# Altium PCB demo_dermis_main_testboard_scratch.PcbDoc (part 2 of 7)
Units mm, origin at the board's own origin, x right, y up, seen from the top; angles counter-clockwise.
Board outline 348.67 x 247.5 mm, 4 copper layers (Top Layer, Layer 1, Layer 2, Bottom Layer), stack 0.603 mm thick; 416 components, 288 nets, 1934 pads, 1690 vias.
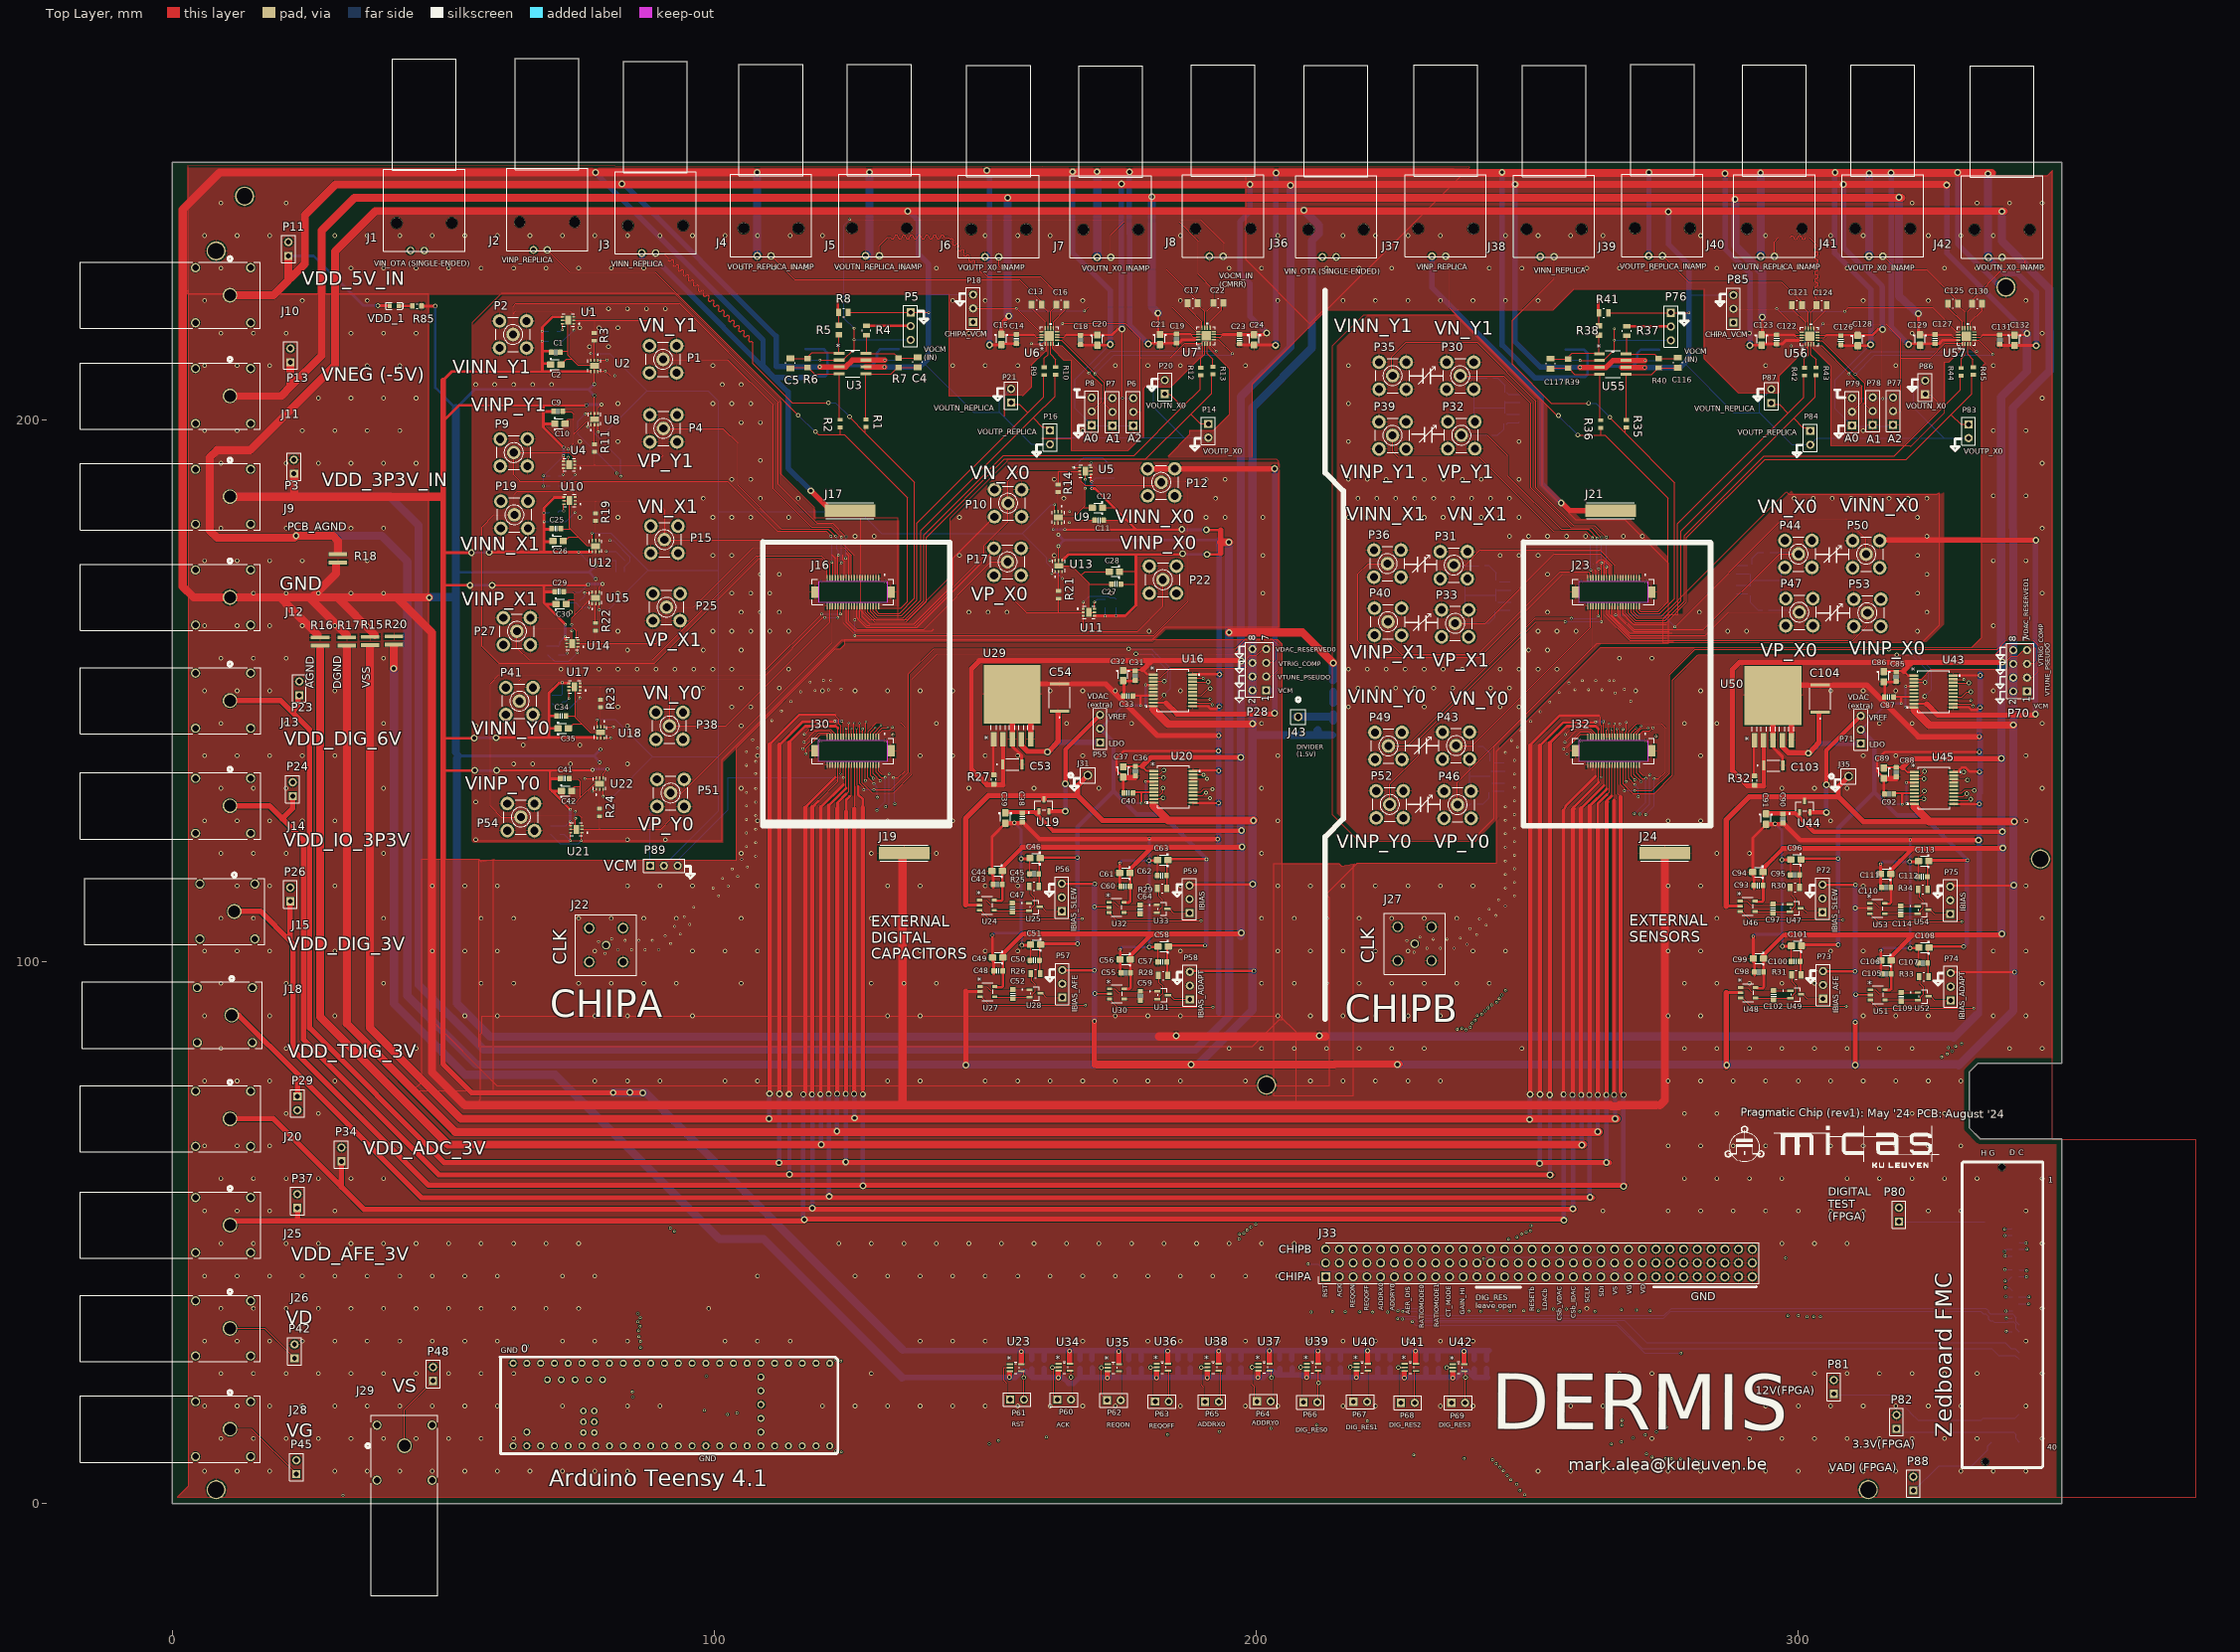
[diagram p0: Top Layer view]

## Part data (continued)
U26: "RT1062 Teensy 4.1 series ARM® Cortex®-M7 MPU Embedded Evaluation Board", Package=None, Check_prices=https://www.snapeda.com/parts/DEV-16771/SparkFun+Electronics/view-part/?ref=eda, MF="SparkFun Electronics", MP=DEV-16771, SnapEDA_Link=https://www.snapeda.com/parts/DEV-16771/SparkFun+Electronics/view-part/?ref=snap
VDD_1: library part LED_SMD_Red_0603_220mcd, "LED 0603 SMD Hyper Red 630nm 220mcd 20mA", Manufacturer 1="Kingbright Corp", Manufacturer Part Number 1=APT1608SURCK, Package / Case="0603 (1608 metric)", Ratings="220 mcd; 630 nm", Supplier Part Number 1=754-1123-1-ND, Voltage - Forward (Vf) @ 10mA=1.9V, Voltage - Forward (Vf) Typ=1.95V, Material="AlGaInP on GaAs", Supplier 1=Digi-Key

## Free pads (board coordinates)
  round 3.508 hole 3 mask+0: 3(8.122,2.566) 3(8.122,231.166) 3(13.354,241.272) 3(201.909,77.232) 3(312.922,2.566) 3(338.322,224.469) 3(344.692,118.957)

## Via types
v1: diameter 0.85, hole 0.5, Top Layer to Bottom Layer, 1036 vias
v2: diameter 0.5, hole 0.3, Top Layer to Bottom Layer, 455 vias
v3: diameter 1.27, hole 0.711, Top Layer to Bottom Layer, 133 vias
v4: diameter 0.7, hole 0.4, Top Layer to Bottom Layer, 26 vias
v5: diameter 0.4, hole 0.25, Top Layer to Bottom Layer, 24 vias
v6: diameter 1.1, hole 0.7, Top Layer to Bottom Layer, 16 vias

## Nets (pads, with @x,y where several pads share a name; then routed paths per layer and width w, separated by ;. In a path a pad name is that pad's centre, name@x,y a point inside that pad or via, vN(x,y) a via of type N, cw(c..) or ccw(c..) an arc to the next point about the centre after c; other vN are vias at no path point)
A0: P8.2 U6.4 U7.4 | length 44.9
  Top Layer w0.2: U6.4@162.584,214.027 162.584,213.747 162.611,213.72 164.088,213.72 169.129,208.68 171.505,206.304 171.505,203.405 P8.2@169.657,201.557 ; U7.4@191.479,214.086 191.479,213.806 v2(192.624,212.662)
  Bottom Layer w0.2: v2(169.112,208.663) 169.221,208.663 173.219,212.662 v2(192.624,212.662)
A1: P7.2 U6.5 U7.5 | length 49.7
  Top Layer w0.2: U6.5@163.281,214.724 164.129,214.724 172.016,206.837 172.016,202.913 P7.2@173.467,201.462 P7.2@173.467,201.124 ; U7.5@192.177,214.783 193.024,214.783 v2(195.604,212.203)
  Bottom Layer w0.2: v2(170.261,208.487) 173.757,211.983 195.385,211.983 v2(195.604,212.203)
A2: P6.2 U6.1 U7.1 | length 52.7
  Top Layer w0.2: v2(158.531,214.074) 160.636,214.074 160.868,214.306 161.083,214.091 U6.1@161.083,214.027 ; v2(164.292,217.785) 175.847,217.785 178.611,215.022 178.611,201.73 178.368,201.487 177.338,201.487 P6.2@177.318,201.468 ; 178.68,211.492 184.161,211.492 186.845,214.177 189.952,214.177 189.979,214.15 U7.1@189.979,214.086
  Bottom Layer w0.2: v2(158.531,214.074) 160.2,214.074 160.432,214.306 160.808,214.306 163.746,217.244 163.749,217.244 v2(164.292,217.785)
ACK: J33.5 P60.2 U34.4 | length 69.5
  Top Layer w0.15: U34.4@165.628,24.488 165.835,24.488 U34.4@165.838,24.49 ; P60.2@165.838,19.176 U34.4@165.838,24.49 ; v1(165.86,23.334) 165.86,24.302 165.957,24.399 165.851,24.504 U34.4@165.838,24.49
  Layer 1 w0.15: v2(214.091,35.416) 214.099,35.424 214.099,42.94 215.344,44.185 J33.5@215.344,44.403
  Layer 2 w0.15: v1(165.86,23.334) 177.352,34.827 213.503,34.827 v2(214.091,35.416)